# EAGLE board CT_schematic (EAGLE 7.6.0)

Size 100 x 80 mm. Coordinates in mm from the lower left corner, seen from the top.
Outline: 0,0 100,0 100,80 0,80 0,0
Copper layers (1*16): Top 0.035mm / dielectric 1.5mm / Bottom 0.035mm
Design rules "default": minimum track width 10mil, minimum drill 24mil, track to track 8mil, track to pad 8mil, pad to pad 8mil, via to via 8mil, smd to smd 8mil, copper to edge 40mil, drill to drill 8mil, minimum pad ring 10mil, minimum via ring 8mil, stop-mask expansion 4mil, vias tented up to drill 0mil, thermal gap 10mil

## Footprints (pad centres in the part's own frame; a part is rotated, then mirrored left to right if it is on the bottom)
C0603 = smd 0.8 x 0.8: 1 -0.762,0; 2 0.762,0
C0402 = smd 0.5 x 0.5: 1 -0.508,0; 2 0.508,0
C0805 = smd 1.2 x 1.3: 1 -1.016,0; 2 1.016,0
C1210 = smd 1.2 x 2.5: 1 -1.524,0; 2 1.524,0
R0603 = smd 0.8 x 0.8: 1 -0.762,0; 2 0.762,0
EXV-9H = smd 3.505 x 1.676: 1 -2.857,0; 2 2.857,0
L0603 = smd 0.8 x 0.8: 1 -0.762,0; 2 0.762,0
PJ-037B_PACKAGE = drill 3.7 square: 1 12,0 | drill 3.2 square: 2 6,0
LQFP144 = smd 0.35 x 1.35: 1 -8.75,-10.625; 2 -8.25,-10.625; 3 -7.75,-10.625; 4 -7.25,-10.625; 5 -6.75,-10.625; 6 -6.25,-10.625; 7 -5.75,-10.625; 8 -5.25,-10.625; 9 -4.75,-10.625; 10 -4.25,-10.625; 11 -3.75,-10.625; 12 -3.25,-10.625; 13 -2.75,-10.62; 14 -2.25,-10.625; 15 -1.75,-10.625; 16 -1.25,-10.625; 17 -0.75,-10.625; 18 -0.25,-10.625; 19 0.25,-10.625; 20 0.75,-10.625; 21 1.25,-10.625; 22 1.75,-10.625; 23 2.25,-10.625; 24 2.75,-10.62; 25 3.25,-10.625; 26 3.75,-10.625; 27 4.25,-10.625; 28 4.75,-10.625; 29 5.25,-10.625; 30 5.75,-10.625; 31 6.25,-10.625; 32 6.75,-10.625; 33 7.25,-10.625; 34 7.75,-10.625; 35 8.25,-10.625; 36 8.75,-10.625; 73 8.75,10.625; 74 8.25,10.625; 75 7.75,10.625; 76 7.25,10.625; 77 6.75,10.625; 78 6.25,10.625; 79 5.75,10.625; 80 5.25,10.625; 81 4.75,10.625; 82 4.25,10.625; 83 3.75,10.625; 84 3.25,10.625; 85 2.75,10.625; 86 2.25,10.625; 87 1.75,10.625; 88 1.25,10.625; 89 0.75,10.625; 90 0.25,10.625; 91 -0.25,10.625; 92 -0.75,10.625; 93 -1.25,10.625; 94 -1.75,10.625; 95 -2.25,10.625; 96 -2.75,10.625; 97 -3.25,10.625; 98 -3.75,10.625; 99 -4.25,10.625; 100 -4.75,10.625; 101 -5.25,10.625; 102 -5.75,10.625; 103 -6.25,10.625; 104 -6.75,10.625; 105 -7.25,10.625; 106 -7.75,10.625; 107 -8.25,10.625; 108 -8.75,10.625 | smd 1.35 x 0.35: 37 10.625,-8.75; 38 10.625,-8.25; 39 10.625,-7.75; 40 10.625,-7.25; 41 10.625,-6.75; 42 10.625,-6.25; 43 10.625,-5.75; 44 10.625,-5.25; 45 10.625,-4.75; 46 10.625,-4.25; 47 10.625,-3.75; 48 10.625,-3.25; 49 10.625,-2.75; 50 10.625,-2.25; 51 10.625,-1.75; 52 10.625,-1.25; 53 10.625,-0.75; 54 10.625,-0.25; 55 10.625,0.25; 56 10.625,0.75; 57 10.625,1.25; 58 10.625,1.75; 59 10.625,2.25; 60 10.625,2.75; 61 10.625,3.25; 62 10.625,3.75; 63 10.625,4.25; 64 10.625,4.75; 65 10.625,5.25; 66 10.625,5.75; 67 10.625,6.25; 68 10.625,6.75; 69 10.625,7.25; 70 10.625,7.75; 71 10.625,8.25; 72 10.625,8.75; 109 -10.625,8.75; 110 -10.625,8.25; 111 -10.625,7.75; 112 -10.625,7.25; 113 -10.625,6.75; 114 -10.625,6.25; 115 -10.625,5.75; 116 -10.625,5.25; 117 -10.625,4.75; 118 -10.625,4.25; 119 -10.625,3.75; 120 -10.625,3.25; 121 -10.625,2.75; 122 -10.625,2.25; 123 -10.625,1.75; 124 -10.625,1.25; 125 -10.625,0.75; 126 -10.625,0.25; 127 -10.625,-0.25; 128 -10.625,-0.75; 129 -10.625,-1.25; 130 -10.625,-1.75; 131 -10.625,-2.25; 132 -10.625,-2.75; 133 -10.625,-3.25; 134 -10.625,-3.75; 135 -10.625,-4.25; 136 -10.625,-4.75; 137 -10.625,-5.25; 138 -10.625,-5.75; 139 -10.625,-6.25; 140 -10.625,-6.75; 141 -10.625,-7.25; 142 -10.625,-7.75; 143 -10.625,-8.25; 144 -10.625,-8.75
SOT-23-6 = smd 1.1 x 0.6: 1 -1.4,0.95; 2 -1.4,0; 3 -1.4,-0.95; 4 1.4,-0.95; 5 1.4,0; 6 1.4,0.95
SAMTEC_FTSH-105-01-L-DV-K = smd 0.762 x 2.794: 1 -2.54,-2.032; 2 -2.54,2.032; 3 -1.27,-2.032; 4 -1.27,2.032; 5 0,-2.032; 6 0,2.032; 7 1.27,-2.032; 8 1.27,2.032; 9 2.54,-2.032; 10 2.54,2.032
LH430WV2-SD01 = smd 0.23 x 0.7: 1 0,0; 2 -0.4,0; 3 -0.8,0; 4 -1.2,0; 5 -1.6,0; 6 -2,0; 7 -2.4,0; 8 -2.8,0; 9 -3.2,0; 10 -3.6,0; 11 -4,0; 12 -4.4,0; 13 -4.8,0; 14 -5.2,0; 15 -5.6,0; 16 -5.6,-2.15; 17 -5.2,-2.15; 18 -4.8,-2.15; 19 -4.4,-2.15; 20 -4,-2.15; 21 -3.6,-2.15; 22 -3.2,-2.15; 23 -2.8,-2.15; 24 -2.4,-2.15; 25 -2,-2.15; 26 -1.6,-2.15; 27 -1.2,-2.15; 28 -0.8,-2.15; 29 -0.4,-2.15; 30 0,-2.15
M41T65_QFN-16 = smd 0.775 x 0.305: 1 -1.387,0.75; 2 -1.387,0.25; 3 -1.387,-0.25; 4 -1.387,-0.75; 9 1.387,-0.75; 10 1.387,-0.25; 11 1.387,0.25; 12 1.387,0.75 | smd 0.305 x 0.775: 5 -0.75,-1.387; 6 -0.25,-1.387; 7 0.25,-1.387; 8 0.75,-1.387; 13 0.75,1.387; 14 0.25,1.387; 15 -0.25,1.387; 16 -0.75,1.387 | smd 1.6 x 1.6: 17 0,0
WSON-8-PAD = smd 0.45 x 0.7: 1 -0.75,-0.95; 2 0.52,-0.95; 3 1.79,-0.95; 4 3.06,-0.95; 5 3.06,4.35; 6 1.79,4.35; 7 0.52,4.35; 8 -0.75,4.35 | smd 4 x 3.5: PAD 1.15,1.7
QFN-32 = smd 0.6 x 0.3: 1 -2.3,1.75; 2 -2.3,1.25; 3 -2.3,0.75; 4 -2.3,0.25; 5 -2.3,-0.25; 6 -2.3,-0.75; 7 -2.3,-1.25; 8 -2.3,-1.75; 17 2.3,-1.75; 18 2.3,-1.25; 19 2.3,-0.75; 20 2.3,-0.25; 21 2.3,0.25; 22 2.3,0.75; 23 2.3,1.25; 24 2.3,1.75 | smd 0.3 x 0.6: 9 -1.75,-2.3; 10 -1.25,-2.3; 11 -0.75,-2.3; 12 -0.25,-2.3; 13 0.25,-2.3; 14 0.75,-2.3; 15 1.25,-2.3; 16 1.75,-2.3; 25 1.75,2.3; 26 1.25,2.3; 27 0.75,2.3; 28 0.25,2.3; 29 -0.25,2.3; 30 -0.75,2.3; 31 -1.25,2.3; 32 -1.75,2.3 | smd 3.2 x 3.2: EXP 0,0
SJ-43515TS-SMT-TR = smd 2.2 x 3: 1 0.6,-7.4; 4 3.4,-7.4 | smd 3 x 3: 2 12.8,-7.4; 5 17,-3 | smd 2 x 3: 3 5.3,0; 6 2.5,0 | drill 1.8: P$7 4.5,-3.69; P$8 11.54,-3.69
WM-64PC = drill 0.6 pad 1: 1 -1,0.95; 2 -1,-0.95
MICRO_USB_AB = smd 0.4 x 1.35: 1 1.3,0.26; 2 0.65,0.26; 3 0,0.26; 4 -0.65,0.26; 5 -1.3,0.26 | drill 0.6 pad 0.95 long: 6 4.175,-2.54; 7 -4.175,-2.54 | drill 0.7 pad 1.1 long: 8 -2.225,0.46; 9 2.225,0.46
SOT143B = smd 1 x 0.7: 1 -0.75,-1 | smd 0.6 x 0.7: 2 0.95,-1; 3 0.95,1; 4 -0.95,1
ABS07-32.768KHZ-7-T = smd 1.1 x 2.4: 1 -2.5,0; 2 0,0
ASEK = smd 1.4 x 1: 1 -1.1,-0.8; 2 1.1,-0.8; 3 1.1,0.8; 4 -1.1,0.8
ASFL1 = smd 1.7 x 1.5: 1 -1.27,-1.1; 2 1.27,-1.1; 3 1.27,1.1; 4 -1.27,1.1
SOIC-8_EP = smd 1.6 x 0.533: 1 -2.921,1.905; 2 -2.921,0.635; 3 -2.921,-0.635; 4 -2.921,-1.905; 5 2.921,-1.905; 6 2.921,-0.635; 7 2.921,0.635; 8 2.921,1.905 | smd 2.54 x 3.302: EPAD 0,0 | drill 0.406 pad 0.406: P$1 -0.508,0.635; P$2 0.381,0.635; P$3 -0.508,-0.635; P$4 0.381,-0.635
WSON-8 = smd 0.3 x 0.6: 1 -0.75,0; 2 0.05,0; 3 0.85,0; 4 1.65,0; 5 1.65,3.8; 6 0.85,3.8; 7 0.05,3.8; 8 -0.75,3.8 | smd 3 x 2.6: PAD 0.45,1.9
SON-6 = smd 0.55 x 0.3: 1 -0.355,0.5 | smd 0.52 x 0.3: 2 -0.37,0; 3 -0.37,-0.5; 4 0.37,-0.5; 5 0.37,0; 6 0.37,0.5
SW_4-1437565-2 = smd 1.4 x 2.1: 1 -2.23,4.55; 2 -2.23,-4.55; 3 2.23,4.55; 4 2.23,-4.55
LGM67K-G1J2-24-Z = smd 0.8 x 1.4: A -2,0; C 0,0
NC7SZ125M5X = smd 1.3 x 0.7: 1 -1.3,0.95; 2 -1.3,0; 3 -1.3,-0.95; 4 1.3,-0.95; 5 1.3,0.95

## Placement (x,y rotation side)
C1  1e-06  [C0603]  -15.24,90.17 0 top  (outside the outline)
C2  1e-07  [C0603]  -19.05,90.17 0 top  (outside the outline)
C3  1e-07  [C0603]  -22.86,90.17 0 top  (outside the outline)
C4  1e-07  [C0603]  -26.67,90.17 0 top  (outside the outline)
C5  1e-07  [C0603]  -30.48,90.17 0 top  (outside the outline)
C6  1e-07  [C0603]  -34.29,90.17 0 top  (outside the outline)
C7  1e-07  [C0603]  -38.1,90.17 0 top  (outside the outline)
C8  1e-07  [C0603]  -41.91,90.17 0 top  (outside the outline)
C9  1e-07  [C0603]  -45.72,90.17 0 top  (outside the outline)
C10  1e-07  [C0603]  -49.53,90.17 0 top  (outside the outline)
C11  1e-07  [C0603]  -53.34,90.17 0 top  (outside the outline)
C12  1e-07  [C0603]  -57.15,90.17 0 top  (outside the outline)
C13  1e-07  [C0603]  -60.96,90.17 0 top  (outside the outline)
C14  4.7e-06  [C0603]  -85.09,85.09 0 top  (outside the outline)
C15  2.2e-06  [C0603]  -88.9,85.09 0 top  (outside the outline)
C16  2.2e-06  [C0603]  -92.71,85.09 0 top  (outside the outline)
C17  1e-08  [C0603]  -64.77,90.17 0 top  (outside the outline)
C18  1e-06  [C0603]  -68.58,90.17 0 top  (outside the outline)
C19  1e-07  [C0603]  -72.39,90.17 0 top  (outside the outline)
C20  2.2e-06  [C0603]  -96.52,85.09 0 top  (outside the outline)
C21  1e-07  [C0402]  -35.56,100.33 0 top  (outside the outline)
C22  1e-07  [C0402]  -39.37,100.33 0 top  (outside the outline)
C23  1e-07  [C0402]  -43.18,100.33 0 top  (outside the outline)
C24  1e-07  [C0402]  -46.99,100.33 0 top  (outside the outline)
C25  1e-07  [C0402]  -50.8,100.33 0 top  (outside the outline)
C26  1e-07  [C0402]  -54.61,100.33 0 top  (outside the outline)
C27  4.7e-06  [C0805]  -45.72,78.74 0 top  (outside the outline)
C28  1e-06  [C0603]  -76.2,90.17 0 top  (outside the outline)
C29  1e-06  [C0603]  -80.01,90.17 0 top  (outside the outline)
C30  1e-06  [C0603]  -83.82,90.17 0 top  (outside the outline)
C31  1e-06  [C0603]  -87.63,90.17 0 top  (outside the outline)
C32  1e-06  [C0603]  -91.44,90.17 0 top  (outside the outline)
C33  1e-06  [C0603]  -95.25,90.17 0 top  (outside the outline)
C34  1e-06  [C0603]  -15.24,95.25 0 top  (outside the outline)
C35  1e-06  [C0603]  -19.05,95.25 0 top  (outside the outline)
C36  1e-07  [C0402]  -58.42,100.33 0 top  (outside the outline)
C37  1e-07  [C0402]  -62.23,100.33 0 top  (outside the outline)
C38  1e-07  [C0402]  -66.04,100.33 0 top  (outside the outline)
C39  1e-07  [C0402]  -69.85,100.33 0 top  (outside the outline)
C40  1e-06  [C0603]  -22.86,95.25 0 top  (outside the outline)
C41  1e-08  [C0402]  -73.66,100.33 0 top  (outside the outline)
C42  1e-08  [C0402]  -77.47,100.33 0 top  (outside the outline)
C43  1e-08  [C0402]  -81.28,100.33 0 top  (outside the outline)
C44  1e-05  [C1210]  -38.1,72.39 0 top  (outside the outline)
C45  1e-05  [C1210]  -44.45,72.39 0 top  (outside the outline)
C46  1e-05  [C1210]  -50.8,72.39 0 top  (outside the outline)
C47  1e-05  [C1210]  -57.15,72.39 0 top  (outside the outline)
C48  1e-08  [C0402]  -85.09,100.33 0 top  (outside the outline)
C49  1e-05  [C1210]  -63.5,72.39 0 top  (outside the outline)
C50  1e-05  [C1210]  -69.85,72.39 0 top  (outside the outline)
C51  1e-08  [C0402]  -88.9,100.33 0 top  (outside the outline)
C52  1e-05  [C1210]  -76.2,72.39 0 top  (outside the outline)
C53  1e-05  [C1210]  -82.55,72.39 0 top  (outside the outline)
C54  1e-08  [C0402]  -92.71,100.33 0 top  (outside the outline)
C55  1e-05  [C1210]  -88.9,72.39 0 top  (outside the outline)
C56  1e-05  [C1210]  -95.25,72.39 0 top  (outside the outline)
C57  8e-07  [R0603]  -26.67,95.25 0 top  (outside the outline)
C58  8e-06  [R0603]  -30.48,95.25 0 top  (outside the outline)
C59  1e-07  [C0402]  -96.52,100.33 0 top  (outside the outline)
C60  0.0001  [EXV-9H]  -55.88,63.5 0 top  (outside the outline)
C61  0.0001  [EXV-9H]  -67.31,63.5 0 top  (outside the outline)
C62  1e-08  [C0402]  -15.24,105.41 0 top  (outside the outline)
C63  1e-08  [C0402]  -19.05,105.41 0 top  (outside the outline)
C64  1e-08  [C0402]  -22.86,105.41 0 top  (outside the outline)
C65  1e-08  [C0402]  -26.67,105.41 0 top  (outside the outline)
F1  240.0  [L0603]  -34.29,95.25 0 top  (outside the outline)
J1  PJ-037B  [PJ-037B_PACKAGE]  -83.82,30.48 0 top  (outside the outline)
R2  1000.0  [R0603]  -38.1,95.25 0 top  (outside the outline)
R4  4700.0  [R0603]  -41.91,95.25 0 top  (outside the outline)
R5  4700.0  [R0603]  -45.72,95.25 0 top  (outside the outline)
R6  4700.0  [R0603]  -49.53,95.25 0 top  (outside the outline)
R7  2200.0  [R0603]  -53.34,95.25 0 top  (outside the outline)
R8  2200.0  [R0603]  -57.15,95.25 0 top  (outside the outline)
R9  2200.0  [R0603]  -60.96,95.25 0 top  (outside the outline)
R10  47000.0  [R0603]  -91.44,78.74 0 top  (outside the outline)
R11  10000.0  [R0603]  -96.52,78.74 0 top  (outside the outline)
R12  10000.0  [R0603]  -15.24,85.09 0 top  (outside the outline)
R13  10000.0  [R0603]  -20.32,85.09 0 top  (outside the outline)
R14  10000.0  [R0603]  -25.4,85.09 0 top  (outside the outline)
R15  10000.0  [R0603]  -30.48,85.09 0 top  (outside the outline)
R16  10000.0  [R0603]  -35.56,85.09 0 top  (outside the outline)
R17  10000.0  [R0603]  -40.64,85.09 0 top  (outside the outline)
R18  10000.0  [R0603]  -45.72,85.09 0 top  (outside the outline)
R19  5.0  [R0603]  -64.77,95.25 0 top  (outside the outline)
R20  10000.0  [R0603]  -50.8,85.09 0 top  (outside the outline)
R21  10000.0  [R0603]  -55.88,85.09 0 top  (outside the outline)
R22  10000.0  [R0603]  -60.96,85.09 0 top  (outside the outline)
R23  10000.0  [R0603]  -66.04,85.09 0 top  (outside the outline)
R24  10000.0  [R0603]  -71.12,85.09 0 top  (outside the outline)
R25  1270.0  [R0603]  -68.58,95.25 0 top  (outside the outline)
R26  1270.0  [R0603]  -72.39,95.25 0 top  (outside the outline)
R27  910.0  [R0603]  -76.2,95.25 0 top  (outside the outline)
R28  2200.0  [R0603]  -80.01,95.25 0 top  (outside the outline)
R29  100000.0  [R0603]  -55.88,78.74 0 top  (outside the outline)
R30  1800.0  [R0603]  -83.82,95.25 0 top  (outside the outline)
R31  1000.0  [R0603]  -87.63,95.25 0 top  (outside the outline)
R32  100000.0  [R0603]  -60.96,78.74 0 top  (outside the outline)
R33  2231.0  [R0603]  -91.44,95.25 0 top  (outside the outline)
R34  1000.0  [R0603]  -95.25,95.25 0 top  (outside the outline)
R35  100000.0  [R0603]  -66.04,78.74 0 top  (outside the outline)
R36  3900.0  [R0603]  -15.24,100.33 0 top  (outside the outline)
R37  1000.0  [R0603]  -19.05,100.33 0 top  (outside the outline)
R38  100000.0  [R0603]  -71.12,78.74 0 top  (outside the outline)
R39  842943.08  [R0603]  -50.8,78.74 0 top  (outside the outline)
R40  100000.0  [R0603]  -76.2,78.74 0 top  (outside the outline)
R41  10000.0  [R0603]  -76.2,85.09 0 top  (outside the outline)
R42  10000.0  [R0603]  -81.28,85.09 0 top  (outside the outline)
R43  9100.0  [R0603]  -22.86,100.33 0 top  (outside the outline)
R44  680000.0  [R0603]  -81.28,78.74 0 top  (outside the outline)
R45  120000.0  [R0603]  -86.36,78.74 0 top  (outside the outline)
U1  STM32F479ZIT6  [LQFP144]  -24.13,11.43 0 top  (outside the outline)
U2  MAX4995AAUT+T  [SOT-23-6]  -15.24,78.74 0 top  (outside the outline)
U3  FTSH-105-01-L-DV-K  [SAMTEC_FTSH-105-01-L-DV-K]  -58.42,7.62 0 top  (outside the outline)
U4  LH430WV2-SD01  [LH430WV2-SD01]  -26.67,101.6 0 top  (outside the outline)
U5  M41T65Q6F  [M41T65_QFN-16]  -31.75,105.41 0 top  (outside the outline)
U6  MX25R6435FZAIH0  [WSON-8-PAD]  -46.99,41.91 0 top  (outside the outline)
U7  SGTL5000XNAA3  [QFN-32]  -69.85,43.18 0 top  (outside the outline)
U8  SJ-43515TS-SMT-TR  [SJ-43515TS-SMT-TR]  -91.44,10.16 0 top  (outside the outline)
U9  SJ-43515TS-SMT-TR  [SJ-43515TS-SMT-TR]  -39.37,33.02 0 top  (outside the outline)
U10  SJ-43515TS-SMT-TR  [SJ-43515TS-SMT-TR]  -67.31,33.02 0 top  (outside the outline)
U11  WM-64PCT  [WM-64PC]  -55.88,43.18 0 top  (outside the outline)
U12  47590-0001  [MICRO_USB_AB]  -92.71,30.48 0 top  (outside the outline)
U13  prtr5v0u2ax  [SOT143B]  -46.99,105.41 0 top  (outside the outline)
U14  ABS07-32.768KHZ-7-T  [ABS07-32.768KHZ-7-T]  -88.9,63.5 0 top  (outside the outline)
U15  ASEK-32.768KHz-ECST  [ASEK]  -46.99,63.5 0 top  (outside the outline)
U16  ASFL-24.57MHZ-NCS  [ASFL1]  -86.36,54.61 0 top  (outside the outline)
U17  ASFL1-25MHZ-NCS  [ASFL1]  -26.67,64.77 0 top  (outside the outline)
U18  MIC5234YME  [SOIC-8_EP]  -17.78,72.39 0 top  (outside the outline)
U19  LP3878SDX-ADJ/NOPB  [WSON-8]  -91.44,40.64 0 top  (outside the outline)
U20  LP3878SDX-ADJ/NOPB  [WSON-8]  -30.48,53.34 0 top  (outside the outline)
U21  LP3878SDX-ADJ/NOPB  [WSON-8]  -50.8,53.34 0 top  (outside the outline)
U22  LP2951ACSDX/NOPB  [WSON-8]  -68.58,53.34 0 top  (outside the outline)
U23  TPS3895ADRYR  [SON-6]  -50.8,104.14 0 top  (outside the outline)
U24  4-1437565-2  [SW_4-1437565-2]  -27.94,44.45 0 top  (outside the outline)
U25  Q65110A2395  [LGM67K-G1J2-24-Z]  -26.67,72.39 0 top  (outside the outline)
U26  nc7sz125m5x  [NC7SZ125M5X]  -20.32,78.74 0 top  (outside the outline)
U27  nc7sz125m5x  [NC7SZ125M5X]  -26.67,78.74 0 top  (outside the outline)
U28  nc7sz125m5x  [NC7SZ125M5X]  -33.02,78.74 0 top  (outside the outline)
U29  nc7sz125m5x  [NC7SZ125M5X]  -39.37,78.74 0 top  (outside the outline)

## Library data of the parts
C1-C65 F1 J1 R2 R4-R45 U1-U29 = circuit_tree

## Nets
CLK_CRYSTAL_U5_1: U5.1 U14.1
CLK_CRYSTAL_U5_2: U5.2 U14.2
CLK_U1_7: U1.7 U15.3
CLK_U1_18: U1.18 U17.3
CLK_U7_21: U7.21 U16.3
GND: C1.2 C2.2 C3.2 C4.2 C5.2 C6.2 C7.2 C8.2 C9.2 C10.2 C11.2 C12.2 C13.2 C14.2 C15.2 C16.2 C17.2 C18.2 C19.2 C21.2 C22.2 C23.2 C24.2 C25.2 C26.2 C27.2 C28.2 C36.2 C37.2 C38.2 C39.2 C40.2 C41.2 C42.2 C43.2 C44.2 C45.2 C46.2 C47.2 C48.2 C49.2 C50.2 C51.2 C52.2 C53.2 C54.2 C55.2 C56.2 C57.2 C58.2 C59.2 C60.2 C61.2 C62.2 C63.2 C64.2 C65.2 J1.2 R2.2 R10.2 R13.2 R15.2 R19.2 R20.2 R26.2 R28.2 R31.2 R34.2 R37.2 R40.2 R43.2 R45.2 U1.15 U1.26 U1.33 U1.55 U1.76 U1.109 U1.122 U1.129 U2.2 U3.3 U3.5 U4.1 U4.6 U4.9 U4.12 U4.15 U4.17 U4.18 U4.19 U4.24 U4.27 U5.3 U5.5 U5.17 U6.4 U6.PAD U7.1 U7.3 U7.7 U7.EXP U9.1 U10.1 U11.2 U12.5 U12.6 U12.7 U12.8 U12.9 U13.1 U15.2 U16.2 U17.2 U18.7 U18.EPAD U19.3 U19.PAD U20.3 U20.PAD U21.3 U21.PAD U22.3 U22.4 U22.PAD U23.2 U25.C U26.2 U26.3 U27.1 U27.3 U28.1 U28.3 U29.1 U29.3
NET_U1_20: R6.1 U1.20 U29.4
NET_U1_28: C17.1 C18.1 F1.1 U1.27 U1.28
NET_U1_43: R13.1 U1.43
NET_U1_65: C15.1 U1.65
NET_U1_84: C20.2 U1.84
NET_U1_87: C20.1 U1.81 U1.87
NET_U1_108: C16.1 U1.108
NET_U1_135: R7.1 U1.135 U5.10
NET_U1_136: R8.1 U1.136 U5.9
NET_U1_137: R12.1 U1.137
NET_U1_140: U25.A
NET_U1_141: U24.3 U24.4
NET_U1_142: R11.1 U1.142
NET_U2_3: R10.1 U2.3
NET_U3_9: R19.1 U3.9
NET_U4_4: R4.1 U4.4 U27.4
NET_U4_5: R9.1
NET_U4_20: R20.1 U4.20
NET_U5_4: R21.1 U5.4
NET_U5_11: R22.1 U5.11
NET_U6_7: R5.1 U1.30 U6.7 U28.4
NET_U7_10: C39.1 U7.10
NET_U7_29: R25.1 U7.29
NET_U7_31: R26.1 U7.31
NET_U8_1: U7.4 U8.1
NET_U8_2: U7.2 U8.2
NET_U8_5: U7.6 U8.5
NET_U9_2: C30.1 U9.2
NET_U9_5: C29.1 U9.5
NET_U9_11: C30.2
NET_U9_12: C29.2
NET_U10_2: C32.1 C33.1 U10.2
NET_U10_5: C31.1 U10.5
NET_U10_13: C32.2 C33.2
NET_U10_14: C31.2
NET_U11_1: C34.1 C35.1 C40.1 U7.16 U11.1
NET_U11_15: C34.2 C35.2
NET_U18_4: R27.2 R28.1 U18.4
NET_U19_1: C48.1 U19.1
NET_U19_6: R30.2 R31.1 U19.6
NET_U19_8: R29.1 U19.8
NET_U20_1: C51.1 U20.1
NET_U20_6: R33.2 R34.1 U20.6
NET_U20_8: R32.1 U20.8
NET_U21_1: C54.1 U21.1
NET_U21_6: R36.2 R37.1 U21.6
NET_U21_8: R35.1 U21.8
NET_U22_5: R38.1 U22.5
NET_U22_7: R39.2 R40.1 U22.7
NET_U23_1: R42.1 R43.1 U23.1
NET_U23_3: R44.2 R45.1 U23.3
NET_U23_4: R41.1 U23.4 U26.4 U27.2 U28.2 U29.2
NET_U24_1: R2.1 U24.1 U24.2
PROC_DSIHOST_CKN: U1.86 U4.13
PROC_DSIHOST_CKP: U1.85 U4.14
PROC_DSIHOST_D0N: U1.83 U4.7
PROC_DSIHOST_D0P: U1.82 U4.8
PROC_DSIHOST_D1N: U1.89 U4.10
PROC_DSIHOST_D1P: U1.88 U4.11
PROC_GPIO_TO_U1_USB_FAULT: R14.1 U1.2 U2.6
PROC_GPIO_TO_U1_VBUS_EN: R15.1 U1.1 U2.4
PROC_I2S2_CK: U1.68 U7.24
PROC_I2S2_EXT_SD: U1.23 U7.25
PROC_I2S2_SD: U1.22 U7.26
PROC_I2S2_WS: U1.67 U7.23
PROC_QUADSPI_BK1_IO0: U1.74 U6.5
PROC_QUADSPI_BK1_IO1: U1.75 U6.2
PROC_QUADSPI_BK1_IO2: R24.1 U1.144 U6.3
PROC_QUADSPI_BK1_NCS: R23.1 U1.63 U6.1
PROC_QUADSPI_CLK: U1.17 U6.6
PROC_SYS_JTCK_SWCLK: R17.1 U1.111 U3.4
PROC_SYS_JTDO_SWO: U1.132 U3.6
PROC_SYS_JTMS_SWDIO: R18.1 U1.107 U3.2
PROC_USB_OTG_FS_DM: U1.105 U12.2 U13.3
PROC_USB_OTG_FS_DP: U1.106 U12.3 U13.2
PROC_USB_OTG_FS_ID: U1.104 U12.4
PROC_USB_OTG_FS_VBUS: U1.103 U2.1 U12.1 U13.4
RST_OUT_U3_JTAG_RST_B: R16.1 U3.10 U26.1
VCC_S1_14V1: C44.1 C45.1 C49.1 C52.1 C55.1 C57.1 C60.1 C61.1 J1.1 R29.2 R32.2 R35.2 U18.5 U18.8 U19.4 U20.4 U21.4 U22.8
VCC_TIER1_1V5: C36.1 C46.1 C47.1 R27.1 U4.29 U7.30 U18.1
VCC_TIER1_2V8: C24.1 C25.1 C26.1 C50.1 R30.1 U4.16 U4.21 U4.22 U4.23 U19.5
VCC_TIER1_3V3: C1.1 C2.1 C3.1 C4.1 C5.1 C6.1 C7.1 C8.1 C9.1 C10.1 C11.1 C12.1 C13.1 C14.1 C19.1 C21.1 C22.1 C27.1 C28.1 C37.1 C38.1 C41.1 C42.1 C43.1 C53.1 C59.1 C62.1 C63.1 C64.1 C65.1 F1.2 R4.2 R5.2 R6.2 R7.2 R8.2 R9.2 R11.2 R12.2 R14.2 R16.2 R17.2 R18.2 R21.2 R22.2 R23.2 R24.2 R25.2 R33.1 R41.2 R42.2 R44.1 U1.5 U1.16 U1.25 U1.34 U1.46 U1.56 U1.66 U1.77 U1.80 U1.97 U1.110 U1.123 U1.130 U1.143 U3.1 U4.2 U5.14 U6.8 U7.5 U7.20 U15.4 U16.4 U17.4 U20.5 U23.6 U26.5 U27.5 U28.5 U29.5
VCC_TIER1_5V0: C56.1 R36.1 U2.5 U21.5
VCC_TIER1_12V0: C23.1 C58.1 R38.2 R39.1 U4.30 U22.1

## Tracks (layer width: path | path; a pad name or v marks a point on that pad's centre or on a via)
CLK_CRYSTAL_U5_1  (1 unrouted)
CLK_CRYSTAL_U5_2  (1 unrouted)
CLK_U1_7  (1 unrouted)
CLK_U1_18  (1 unrouted)
CLK_U7_21  (1 unrouted)
GND  (134 unrouted)
NET_U1_20  (2 unrouted)
NET_U1_28  (4 unrouted)
NET_U1_43  (1 unrouted)
NET_U1_65  (1 unrouted)
NET_U1_84  (1 unrouted)
NET_U1_87  (2 unrouted)
NET_U1_108  (1 unrouted)
NET_U1_135  (2 unrouted)
NET_U1_136  (2 unrouted)
NET_U1_137  (1 unrouted)
NET_U1_141  (1 unrouted)
NET_U1_142  (1 unrouted)
NET_U2_3  (1 unrouted)
NET_U3_9  (1 unrouted)
NET_U4_4  (2 unrouted)
NET_U4_20  (1 unrouted)
NET_U5_4  (1 unrouted)
NET_U5_11  (1 unrouted)
NET_U6_7  (3 unrouted)
NET_U7_10  (1 unrouted)
NET_U7_29  (1 unrouted)
NET_U7_31  (1 unrouted)
NET_U8_1  (1 unrouted)
NET_U8_2  (1 unrouted)
NET_U8_5  (1 unrouted)
NET_U9_2  (1 unrouted)
NET_U9_5  (1 unrouted)
NET_U10_2  (2 unrouted)
NET_U10_5  (1 unrouted)
NET_U10_13  (1 unrouted)
NET_U11_1  (4 unrouted)
NET_U11_15  (1 unrouted)
NET_U18_4  (2 unrouted)
NET_U19_1  (1 unrouted)
NET_U19_6  (2 unrouted)
NET_U19_8  (1 unrouted)
NET_U20_1  (1 unrouted)
NET_U20_6  (2 unrouted)
NET_U20_8  (1 unrouted)
NET_U21_1  (1 unrouted)
NET_U21_6  (2 unrouted)
NET_U21_8  (1 unrouted)
NET_U22_5  (1 unrouted)
NET_U22_7  (2 unrouted)
NET_U23_1  (2 unrouted)
NET_U23_3  (2 unrouted)
NET_U23_4  (5 unrouted)
NET_U24_1  (2 unrouted)
PROC_DSIHOST_CKN  (1 unrouted)
PROC_DSIHOST_CKP  (1 unrouted)
PROC_DSIHOST_D0N  (1 unrouted)
PROC_DSIHOST_D0P  (1 unrouted)
PROC_DSIHOST_D1N  (1 unrouted)
PROC_DSIHOST_D1P  (1 unrouted)
PROC_GPIO_TO_U1_USB_FAULT  (2 unrouted)
PROC_GPIO_TO_U1_VBUS_EN  (2 unrouted)
PROC_I2S2_CK  (1 unrouted)
PROC_I2S2_EXT_SD  (1 unrouted)
PROC_I2S2_SD  (1 unrouted)
PROC_I2S2_WS  (1 unrouted)
PROC_QUADSPI_BK1_IO0  (1 unrouted)
PROC_QUADSPI_BK1_IO1  (1 unrouted)
PROC_QUADSPI_BK1_IO2  (2 unrouted)
PROC_QUADSPI_BK1_NCS  (2 unrouted)
PROC_QUADSPI_CLK  (1 unrouted)
PROC_SYS_JTCK_SWCLK  (2 unrouted)
PROC_SYS_JTDO_SWO  (1 unrouted)
PROC_SYS_JTMS_SWDIO  (2 unrouted)
PROC_USB_OTG_FS_DM  (2 unrouted)
PROC_USB_OTG_FS_DP  (2 unrouted)
PROC_USB_OTG_FS_ID  (1 unrouted)
PROC_USB_OTG_FS_VBUS  (3 unrouted)
RST_OUT_U3_JTAG_RST_B  (2 unrouted)
VCC_S1_14V1  (17 unrouted)
VCC_TIER1_1V5  (6 unrouted)
VCC_TIER1_2V8  (9 unrouted)
VCC_TIER1_3V3  (80 unrouted)
VCC_TIER1_5V0  (3 unrouted)
VCC_TIER1_12V0  (5 unrouted)